# EAGLE board projet_electronique (EAGLE 7.2.0)
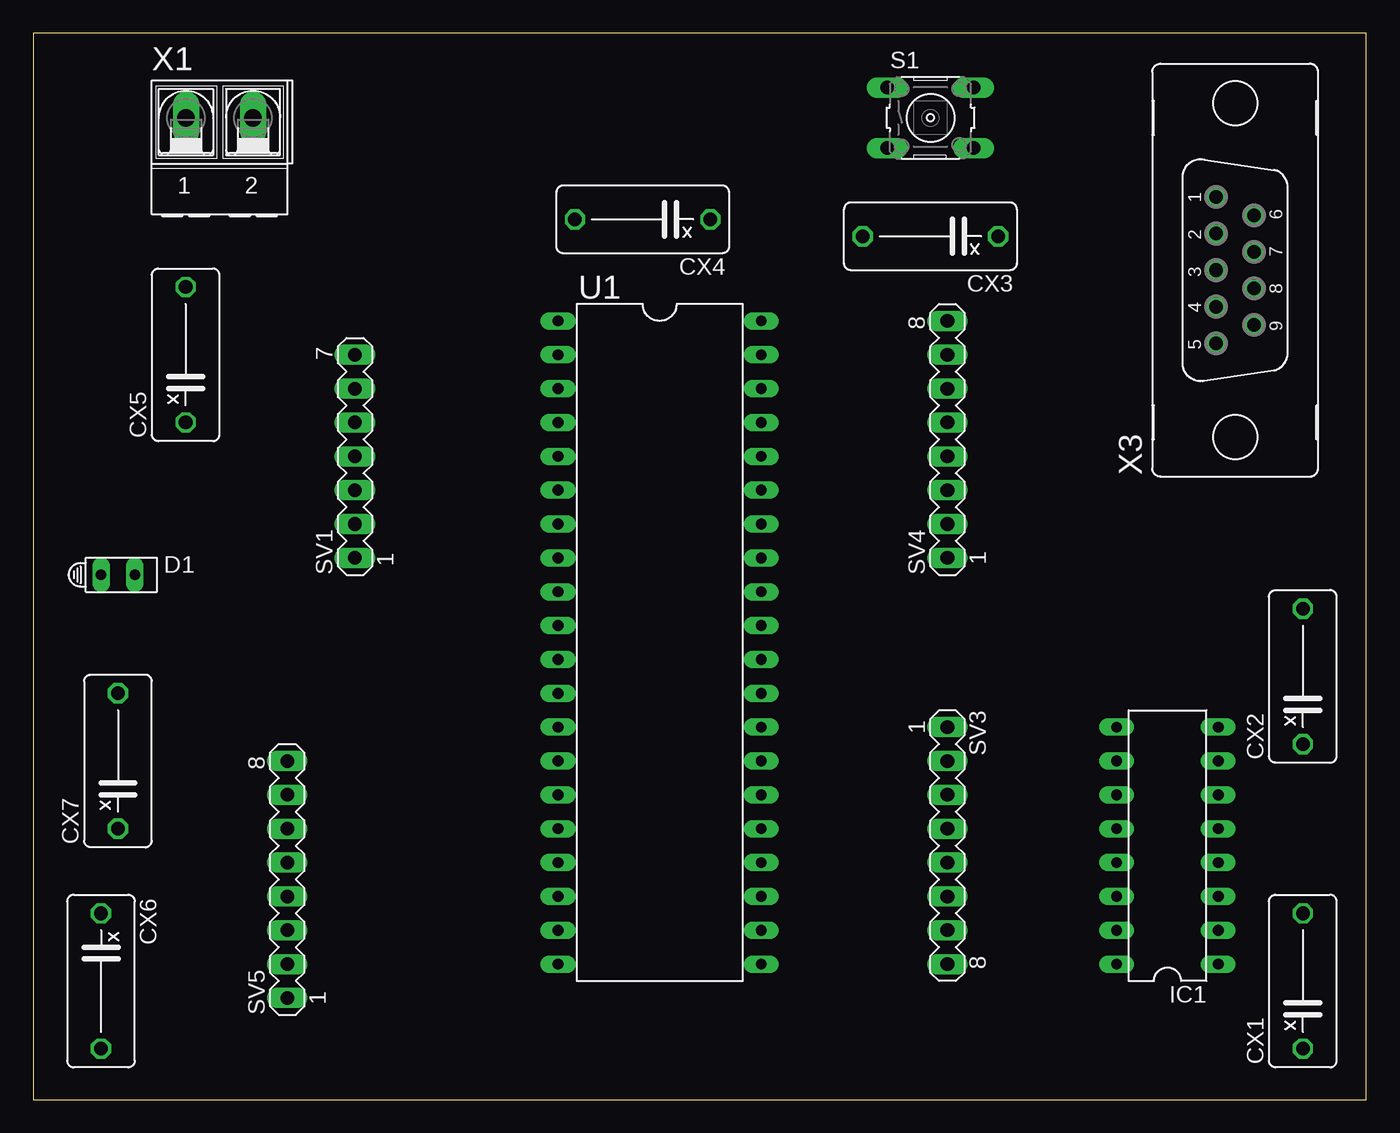
[diagram p0: board, top side]
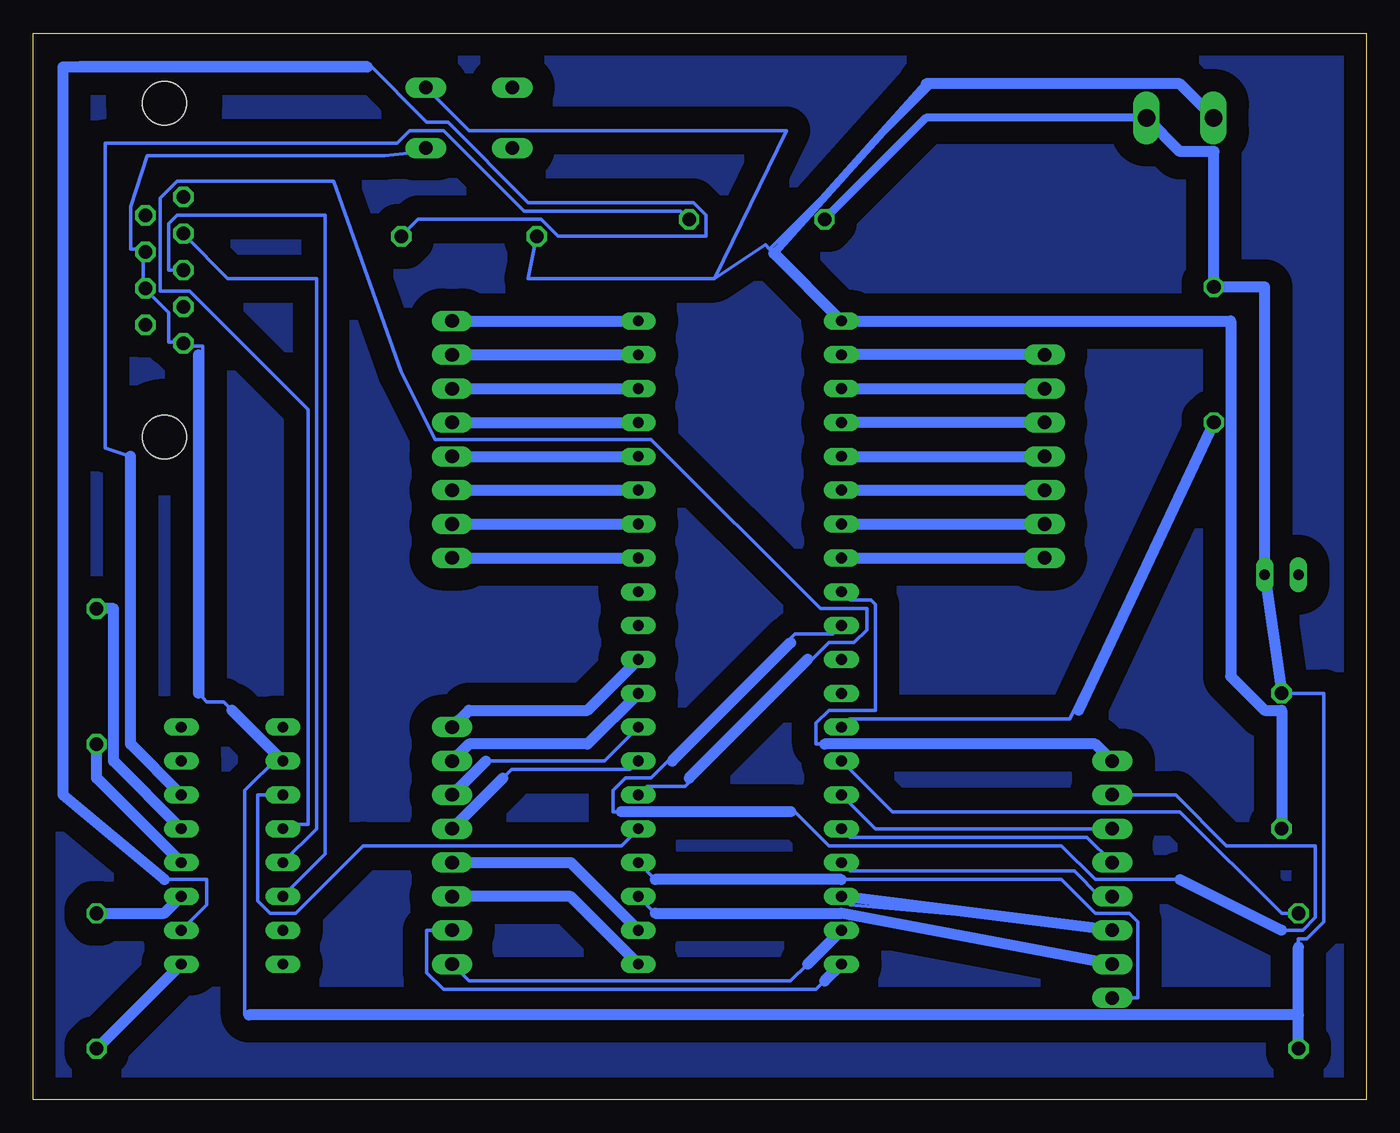
[diagram p1: board, bottom side, seen from below]

Size 100 x 80 mm. Coordinates in mm from the lower left corner, seen from the top.
Outline: 0,0 100,0 100,80 0,80 0,0
Copper layers (1*16): Top 0.035mm / dielectric 1.5mm / Bottom 0.035mm
Design rules "default": minimum track width 10mil, minimum drill 24mil, track to track 8mil, track to pad 8mil, pad to pad 8mil, via to via 8mil, smd to smd 8mil, copper to edge 40mil, drill to drill 8mil, minimum pad ring 10mil, minimum via ring 8mil, stop-mask expansion 4mil, vias tented up to drill 0mil, thermal gap 10mil

## Footprints (pad centres in the part's own frame; a part is rotated, then mirrored left to right if it is on the bottom)
XC10B5 = drill 1.016 octagon: 1 -5.08,0; 2 5.08,0
HLMP6 = drill 0.813 long: A -1.27,0; K 1.27,0
DIL16 = drill 0.813 long: 1 -8.89,-3.81; 2 -6.35,-3.81; 3 -3.81,-3.81; 4 -1.27,-3.81; 5 1.27,-3.81; 6 3.81,-3.81; 7 6.35,-3.81; 8 8.89,-3.81; 9 8.89,3.81; 10 6.35,3.81; 11 3.81,3.81; 12 1.27,3.81; 13 -1.27,3.81; 14 -3.81,3.81; 15 -6.35,3.81; 16 -8.89,3.81
B3F-10XX = drill 1.016 long: 1 -3.251,2.261; 2 3.251,2.261; 3 -3.251,-2.261; 4 3.251,-2.261
MA07-1 = drill 1.016 long: 1 -7.62,0; 2 -5.08,0; 3 -2.54,0; 4 0,0; 5 2.54,0; 6 5.08,0; 7 7.62,0
MA08-1 = drill 1.016 long: 1 -8.89,0; 2 -6.35,0; 3 -3.81,0; 4 -1.27,0; 5 1.27,0; 6 3.81,0; 7 6.35,0; 8 8.89,0
DIL40 = drill 0.813 long: 1 -24.13,-7.62; 2 -21.59,-7.62; 3 -19.05,-7.62; 4 -16.51,-7.62; 5 -13.97,-7.62; 6 -11.43,-7.62; 7 -8.89,-7.62; 8 -6.35,-7.62; 9 -3.81,-7.62; 10 -1.27,-7.62; 11 1.27,-7.62; 12 3.81,-7.62; 13 6.35,-7.62; 14 8.89,-7.62; 15 11.43,-7.62; 16 13.97,-7.62; 17 16.51,-7.62; 18 19.05,-7.62; 19 21.59,-7.62; 20 24.13,-7.62; 21 24.13,7.62; 22 21.59,7.62; 23 19.05,7.62; 24 16.51,7.62; 25 13.97,7.62; 26 11.43,7.62; 27 8.89,7.62; 28 6.35,7.62; 29 3.81,7.62; 30 1.27,7.62; 31 -1.27,7.62; 32 -3.81,7.62; 33 -6.35,7.62; 34 -8.89,7.62; 35 -11.43,7.62; 36 -13.97,7.62; 37 -16.51,7.62; 38 -19.05,7.62; 39 -21.59,7.62; 40 -24.13,7.62
AK500/2-H = drill 1.321 long: 1 -2.515,0; 2 2.515,0
F09V = drill 1.016 octagon: 1 5.486,1.422; 2 2.743,1.422; 3 0,1.422; 4 -2.743,1.422; 5 -5.486,1.422; 6 4.115,-1.422; 7 1.372,-1.422; 8 -1.372,-1.422; 9 -4.115,-1.422 | hole 3.302: -12.522,0; 12.522,0

## Placement (x,y rotation side)
CX1  1u  [XC10B5]  95.25,8.89 90 top
CX2  1u  [XC10B5]  95.25,31.75 90 top
CX3  1u  [XC10B5]  67.31,64.77 180 top
CX4  1u  [XC10B5]  45.72,66.04 180 top
CX5  15p  [XC10B5]  11.43,55.88 90 top
CX6  15p  [XC10B5]  5.08,8.89 270 top
CX7  680n  [XC10B5]  6.35,25.4 90 top
D1  HLMP6  [HLMP6]  6.35,39.37 0 top
IC1  MAX232  [DIL16]  85.09,19.05 90 top
S1  [B3F-10XX]  67.31,73.66 0 top
SV1  [MA07-1]  24.13,48.26 90 top
SV3  [MA08-1]  68.58,19.05 270 top
SV4  [MA08-1]  68.58,49.53 90 top
SV5  [MA08-1]  19.05,16.51 90 top
U1  PIC16F877P  [DIL40]  46.99,34.29 270 top
X1  [AK500/2-H]  13.97,73.66 0 top
X3  [F09V]  90.17,62.23 90 top

## Library data of the parts
CX1-CX7 = rcl
D1 = display-hp; MF: AGILENT TECHNOLOGIES; MPN: HLMP-6500; OC_FARNELL: 1652490; OC_NEWARK: 40K0088
IC1 = maxim; MF: MAXIM; MPN: MAX232ACPE+; OC_FARNELL: 9723773; OC_NEWARK: 68K4544
S1 = switch-omron; MPN: B3F-1000; OC_FARNELL: 176432; OC_NEWARK: 36M3542
SV1 SV3-SV5 = con-lstb; OC_FARNELL: unknown; OC_NEWARK: unknown
U1 = pic16f87x
X1 = con-ptr500; OC_FARNELL: unknown; OC_NEWARK: unknown
X3 = con-subd; OC_FARNELL: unknown; OC_NEWARK: unknown

## Nets
GND: IC1.15
N$1: D1.A
N$3: CX4.2 CX5.2 CX6.2 CX7.2 D1.K IC1.10 S1.4 X1.2 X3.5 X3.7 X3.8
N$4: CX5.1 U1.13
N$5: CX1.1 IC1.1
N$6: CX3.2 CX7.1 S1.2 U1.1 X1.1
N$7: CX6.1 U1.14
N$8: CX1.2 IC1.3
N$9: CX2.1 IC1.4
N$10: CX2.2 IC1.5
N$11: CX3.1 IC1.2
N$12: CX4.1 IC1.6
N$13: IC1.11 U1.25
N$14: IC1.12 U1.26
N$15: SV1.7 U1.2
N$16: IC1.14 X3.3
N$17: IC1.13 X3.2
N$18: SV4.1 U1.33
N$19: SV4.2 U1.34
N$20: SV4.3 U1.35
N$21: SV4.4 U1.36
N$22: SV1.6 U1.3
N$23: SV1.5 U1.4
N$24: SV1.4 U1.5
N$25: SV1.3 U1.6
N$26: SV1.2 U1.7
N$27: SV1.1 U1.8
N$28: SV3.8 U1.19
N$29: SV3.7 U1.20
N$30: SV3.6 U1.21
N$31: SV3.5 U1.22
N$32: SV3.4 U1.27
N$33: SV3.3 U1.28
N$34: SV3.2 U1.29
N$35: SV3.1 U1.30
N$36: SV4.5 U1.37
N$37: SV4.6 U1.38
N$38: SV4.7 U1.39
N$39: SV4.8 U1.40
N$40: SV5.8 U1.9
N$41: SV5.7 U1.10
N$42: SV5.6 U1.15
N$43: SV5.5 U1.16
N$44: SV5.4 U1.17
N$45: SV5.3 U1.18
N$46: SV5.2 U1.23
N$47: SV5.1 U1.24
VCC: IC1.16

## Tracks (layer width: path | path; a pad name or v marks a point on that pad's centre or on a via)
N$2
  Bottom 0.813: 87.63,55.88 87.63,30.48
N$3
  Bottom 0.254: S1.4 70.8,71.12 73.66,70.8 91.44,70.8 92.71,66.99 92.71,63.82 91.76,63.82 X3.7 91.76,63.5 91.76,60.96 X3.8 91.44,60.64 89.85,59.05 89.85,56.83 88.9,56.83 X3.5 88.58,56.52 87.31,56.52 87.31,30.16 87,29.84 85.72,29.84 85.09,29.21 81.6,25.72 | 5.08,11.43 5.08,12.06 4.45,12.06 3.17,13.34 3.17,30.48 CX7.2 | 11.43,71.12 13.65,71.12 16.19,73.66 X1.2 16.51,73.66 | 81.6,25.72 84.14,23.18 84.14,6.35 83.82,6.35 | 81.6,25.72 IC1.10
  Bottom 0.61: 16.51,73.66 33.02,73.66 CX4.2
  Bottom 0.813: 16.51,73.66 13.97,71.12 11.43,71.12 CX5.2 7.62,60.96 D1.K CX7.2 | CX6.2 5.08,6.35 | 5.08,6.35 5.08,11.43 | 5.08,6.35 83.82,6.35 | IC1.10 85.09,29.21
N$4
  Bottom 0.254: U1.13 38.73,28.57 22.23,28.57 CX5.1
  Bottom 0.813: CX5.1 21.59,29.21
N$5
  Bottom 0.813: CX1.1 IC1.1
N$6
  Bottom 0.254: 44.77,63.82 45.09,64.14 48.9,61.59 | 44.77,63.82 44.45,63.5 | 48.9,61.59 62.87,61.59 CX3.2 | 6.35,29.21 7.3,29.21 10.16,32.07 10.16,58.42 | 48.9,61.59 43.5,72.71 67.31,72.71 70.48,75.88 S1.2 | 44.77,63.82 32.38,76.2 14.29,76.2 11.75,73.66 X1.1
  Bottom 0.61: 33.02,76.2 44.45,63.5
  Bottom 0.813: 11.43,73.66 13.97,76.2 33.02,76.2 | 44.45,63.5 U1.1 10.16,58.42 10.16,31.75 7.62,29.21 6.35,29.21 CX7.1
N$7
  Bottom 0.254: U1.14 35.56,21.59 13.97,21.59 6.35,13.97 CX6.1
N$8
  Bottom 0.813: CX1.2 90.17,13.97 IC1.3
N$9
  Bottom 0.813: IC1.4 95.25,24.13 CX2.1
N$10
  Bottom 0.813: IC1.5 93.98,25.4 93.98,36.83 CX2.2
N$11
  Bottom 0.254: IC1.2 87,14.61 87,16.51 89.85,16.51 97.79,23.18 97.79,77.47 96.52,77.79 74.93,77.79 70.48,73.34 68.9,73.34 62.87,67.31 50.48,67.31 49.53,66.36 49.53,64.77 60.64,64.77 61.91,66.04 71.12,66.04 CX3.1
  Bottom 0.813: 74.93,77.47 97.79,77.47 97.79,22.86 90.17,16.51
N$12
  Bottom 0.254: 92.71,48.26 94.61,48.9 94.61,71.75 72.71,71.75 71.75,72.71 69.22,72.71 63.18,66.67 51.44,66.67 CX4.1
  Bottom 0.813: IC1.6 92.71,26.67 92.71,48.26
N$13
  Bottom 0.254: U1.25 55.88,19.05 75.25,19.05 80.33,13.97 82.23,13.97 83.19,14.92 83.19,22.86 IC1.11
N$14
  Bottom 0.254: U1.26 53.98,23.5 51.12,23.5 40.32,34.29 38.42,34.29 37.47,35.24 37.47,36.83 40.96,36.83 53.66,49.53 69.85,49.53 72.39,54.61 77.47,68.9 89.22,68.9 90.49,67.63 90.49,60.64 88.27,60.64 79.38,51.75 79.38,20.64 80.96,20.64 IC1.12
N$15
  Bottom 0.813: SV1.7 U1.2
N$16
  Bottom 0.254: IC1.14 78.11,18.41 78.11,66.36 89.22,66.36 89.85,65.72 89.85,62.23 X3.3
N$17
  Bottom 0.254: IC1.13 78.74,20.32 78.74,61.59 85.41,61.59 88.58,64.77 X3.2
N$18
  Bottom 0.813: SV4.1 U1.33
N$19
  Bottom 0.813: SV4.2 U1.34
N$20
  Bottom 0.813: SV4.3 U1.35
N$21
  Bottom 0.813: SV4.4 U1.36
N$22
  Bottom 0.813: U1.3 SV1.6
N$23
  Bottom 0.813: SV1.5 U1.4
N$24
  Bottom 0.813: U1.5 SV1.4
N$25
  Bottom 0.813: U1.6 SV1.3
N$26
  Bottom 0.813: U1.7 SV1.2
N$27
  Bottom 0.813: U1.8 SV1.1
N$28
  Bottom 0.254: 41.91,10.16 43.18,8.89 67.31,8.89 SV3.8
  Bottom 0.813: U1.19 41.91,10.16
N$29
  Bottom 0.254: 40.64,8.89 41.27,8.26 69.22,8.26 70.48,9.53 70.48,12.7 SV3.7
  Bottom 0.813: U1.20 40.64,8.89
N$30
  Bottom 0.813: U1.21 59.69,15.24 SV3.6
N$31
  Bottom 0.813: SV3.5 59.69,17.78 U1.22
N$32
  Bottom 0.254: U1.27 55.24,24.77 64.14,24.77 64.77,24.13
  Bottom 0.813: 64.77,24.13 SV3.4
N$33
  Bottom 0.254: U1.28 57.15,25.4 66.04,25.4
  Bottom 0.813: SV3.3 66.04,25.4
N$34
  Bottom 0.813: U1.29 58.42,26.67 67.31,26.67 SV3.2
N$35
  Bottom 0.813: SV3.1 67.31,29.21 58.42,29.21 U1.30
N$36
  Bottom 0.813: SV4.5 U1.37
N$37
  Bottom 0.813: SV4.6 U1.38
N$38
  Bottom 0.813: SV4.7 U1.39
N$39
  Bottom 0.813: SV4.8 U1.40
N$40
  Bottom 0.254: U1.9 38.73,37.47 37.15,37.47 36.83,37.15 36.83,29.21 40.32,29.21 41.27,28.26 41.27,26.67 40.64,26.67
  Bottom 0.813: SV5.8 20.32,26.67 40.64,26.67
N$41
  Bottom 0.254: U1.10 40.01,34.92 42.86,34.92 53.66,24.13 55.56,24.13 56.52,23.18 56.52,21.59 55.88,21.59 | 43.18,21.59 42.86,21.59 40.32,19.05 22.86,19.05 20.32,16.51 13.97,16.51 13.65,16.51 6.03,12.7 4.76,12.7 3.81,13.65 3.81,19.05 10.48,19.05 14.29,22.86 SV5.7
  Bottom 0.813: 43.18,21.59 55.88,21.59 | 13.97,16.51 6.35,12.7
N$42
  Bottom 0.254: U1.15 36.83,20.32 SV5.6
N$43
  Bottom 0.254: U1.16 38.73,19.68 20.95,19.68 SV5.5
N$44
  Bottom 0.254: U1.17 38.73,17.14 21.91,17.14 20,15.24 SV5.4
N$45
  Bottom 0.254: U1.18 38.73,14.61 24.45,13.34 20,12.7 SV5.3
  Bottom 0.813: SV5.3 U1.18
N$46
  Bottom 0.254: 53.34,13.97 U1.23 | 39.37,13.97 25.4,11.43 SV5.2
  Bottom 0.813: 53.34,13.97 39.37,13.97 SV5.2
N$47
  Bottom 0.254: 53.34,16.51 U1.24 | 39.37,16.51 22.86,16.51 20.32,13.97 17.78,13.97 17.14,13.34 17.14,7.62 SV5.1
  Bottom 0.813: 39.37,16.51 53.34,16.51
N$48
  Bottom 0.813: 43.18,34.29 52.07,25.4
N$49
  Bottom 0.813: 50.8,24.13 41.91,33.02
N$50
  pour Bottom (isolate 1.676): 0,0 0,80.01 100.33,80.01 100.33,0